# EAGLE board smartsensor (EAGLE 7.4.0)
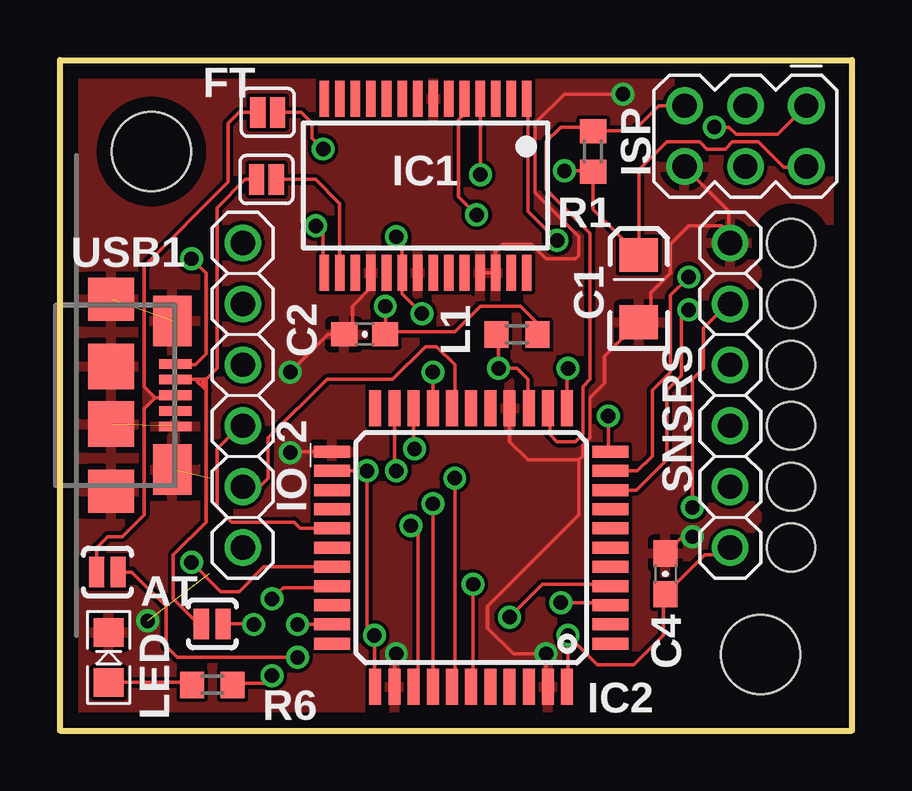
[diagram p0: board, top side]
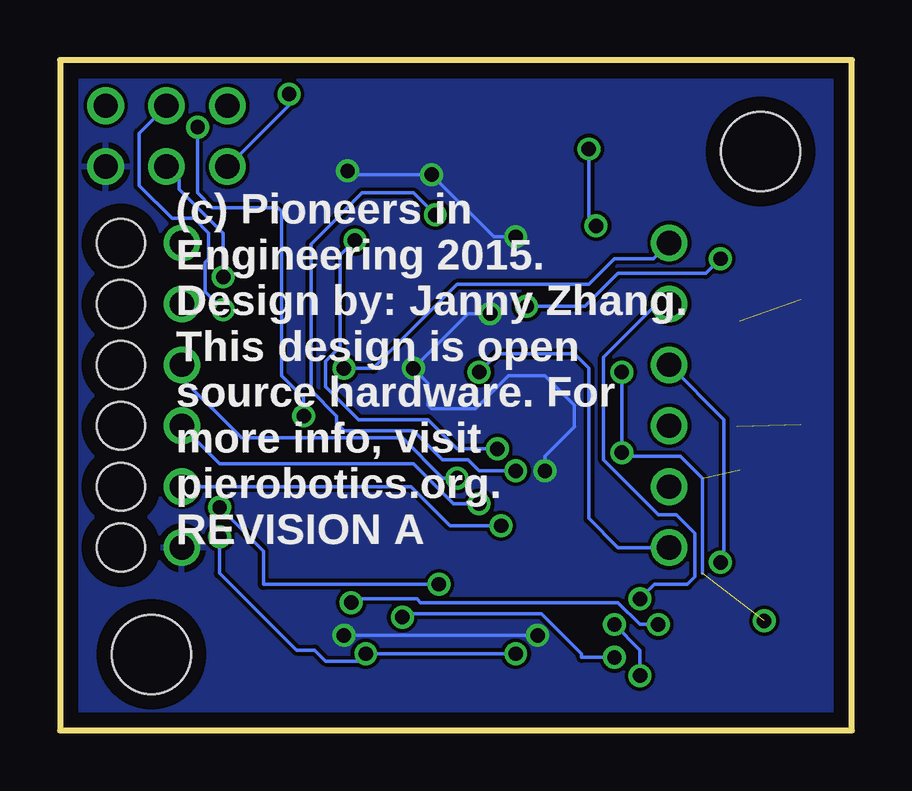
[diagram p1: board, bottom side, seen from below]

Size 33.02 x 27.94 mm. Coordinates in mm from the lower left corner, seen from the top.
Outline: 0,0 0,27.94 33.02,27.94 33.02,0 0,0
Copper layers (1*16): Top 2mil / dielectric 9mil / Bottom 2mil
Design rules "advancedcircuits-33each-pie": minimum track width 6mil, minimum drill 15mil, track to track 6mil, track to pad 6mil, pad to pad 6mil, via to via 6mil, smd to smd 6mil, copper to edge 25mil, drill to drill 7mil, minimum pad ring 7mil, minimum via ring 7mil, stop-mask expansion 3mil, vias tented up to drill 21mil, thermal gap 10mil

## Footprints (pad centres in the part's own frame; a part is rotated, then mirrored left to right if it is on the bottom)
SJ_2S-NO = smd 0.635 x 1.27: 1 -0.45,0; 2 0.45,0
EIA3216 = smd 1.4 x 1.6: A 1.4,0; C -1.4,0
0603-CAP = smd 1.1 x 1: 1 -0.85,0; 2 0.85,0
SJ_2S = smd 0.635 x 1.27: 1 -0.412,0; 2 0.412,0
STAND-OFF = hole 3.302: 0,0
SSOP28 = smd 0.4 x 1.5: 1 -4.225,-3.625; 2 -3.575,-3.625; 3 -2.925,-3.625; 4 -2.275,-3.625; 5 -1.625,-3.625; 6 -0.975,-3.625; 7 -0.325,-3.625; 8 0.325,-3.625; 9 0.975,-3.625; 10 1.625,-3.625; 11 2.275,-3.625; 12 2.925,-3.625; 13 3.575,-3.625; 14 4.225,-3.625; 15 4.225,3.625; 16 3.575,3.625; 17 2.925,3.625; 18 2.275,3.625; 19 1.625,3.625; 20 0.975,3.625; 21 0.325,3.625; 22 -0.325,3.625; 23 -0.975,3.625; 24 -1.625,3.625; 25 -2.275,3.625; 26 -2.925,3.625; 27 -3.575,3.625; 28 -4.225,3.625
TQFP44 = smd 1.5 x 0.5: 1 -5.8,4; 2 -5.8,3.2; 3 -5.8,2.4; 4 -5.8,1.6; 5 -5.8,0.8; 6 -5.8,0; 7 -5.8,-0.8; 8 -5.8,-1.6; 9 -5.8,-2.4; 10 -5.8,-3.2; 11 -5.8,-4; 23 5.8,-4; 24 5.8,-3.2; 25 5.8,-2.4; 26 5.8,-1.6; 27 5.8,-0.8; 28 5.8,0; 29 5.8,0.8; 30 5.8,1.6; 31 5.8,2.4; 32 5.8,3.2; 33 5.8,4 | smd 0.5 x 1.5: 12 -4,-5.8; 13 -3.2,-5.8; 14 -2.4,-5.8; 15 -1.6,-5.8; 16 -0.8,-5.8; 17 0,-5.8; 18 0.8,-5.8; 19 1.6,-5.8; 20 2.4,-5.8; 21 3.2,-5.8; 22 4,-5.8; 34 4,5.8; 35 3.2,5.8; 36 2.4,5.8; 37 1.6,5.8; 38 0.8,5.8; 39 0,5.8; 40 -0.8,5.8; 41 -1.6,5.8; 42 -2.4,5.8; 43 -3.2,5.8; 44 -4,5.8
1X06 = drill 1.016 pad 1.524: 1 -6.35,0; 2 -3.81,0; 3 -1.27,0; 4 1.27,0; 5 3.81,0; 6 6.35,0
MA03-2 = drill 1.016 pad 1.524: 1 -2.54,-1.27; 2 -2.54,1.27; 3 0,-1.27; 4 0,1.27; 5 2.54,-1.27; 6 2.54,1.27
R0603 = smd 1 x 1.1: 1 -0.85,0; 2 0.85,0
LED-0805 = smd 1.194 x 1.245: A -1.041,0; C 1.041,0
1X06-STRAINRELIEF = drill 1.016 pad 1.524: 1 -6.35,0; 2 -3.81,0; 3 -1.27,0; 4 1.27,0; 5 3.81,0; 6 6.35,0 | hole 2: -6.35,-2.54; -3.81,-2.54; -1.27,-2.54; 1.27,-2.54; 3.81,-2.54; 6.35,-2.54
USB-MICRO-AB = smd 0.4 x 1.35: P$1 -1.3,1; P$2 -0.65,1; P$3 0,1; P$4 0.65,1; P$5 1.3,1 | smd 2.1 x 1.6: P$6 -3.1,0.875; P$7 3.1,0.875 | smd 1.8 x 1.9: P$8 -4,-1.675; P$9 4,-1.675 | smd 1.9 x 1.9: P$10 -1.2,-1.675; P$11 1.2,-1.675

## Placement (x,y rotation side)
AT_D+  SOLDERJUMPERNO  [SJ_2S-NO]  1.98,6.6 0 top
AT_D-  SOLDERJUMPERNO  [SJ_2S-NO]  6.35,4.45 0 top
C1  10 uF  [EIA3216]  24.13,18.41 90 top
C2  10nF  [0603-CAP]  12.7,16.51 0 top
C4  0.1 uF  [0603-CAP]  25.25,6.53 270 top
FT_DM  SOLDERJUMPERNC  [SJ_2S]  8.61,22.96 0 top
FT_DP  SOLDERJUMPERNC  [SJ_2S]  8.66,25.76 0 top
HOLE1  [STAND-OFF]  3.81,24.13 0 top
HOLE2  [STAND-OFF]  29.21,3.17 0 top
IC1  FT232RL  [SSOP28]  15.24,22.71 180 top
IC2  ATMEGA32U4-AU  [TQFP44]  17.14,7.62 180 top
IO_2  [1X06]  7.62,13.97 90 top
ISP  [MA03-2]  28.57,24.77 180 top
L1  [R0603]  19.05,16.51 0 top
LED1  RED  [LED-0805]  2.03,3.05 90 top
R1  10k  [R0603]  22.23,24.13 90 top
R6  130  [R0603]  6.35,1.91 0 top
SENSORS_IO  [1X06-STRAINRELIEF]  27.94,13.97 90 top
USB1  USB-OTGMICRO-AB  [USB-MICRO-AB]  3.81,13.97 270 top

## Library data of the parts
AT_D+ AT_D- FT_DM FT_DP = pie; PIE-INT-REF-NUM: DNL
C1 HOLE1 HOLE2 L1 SENSORS_IO = pie
C2 C4 = pie; PIE-INT-REF-NUM: CAPACITOR-GENERIC
IC1 = ftdichip; MPN: FT232RL; OC_FARNELL: 1146032; OC_NEWARK: 91K9918
IC2 = pie; PIE-DIGIKEY-PN-ALT1: ATMEGA32U4-MURCT-ND; PIE-DIGIKEY-PN-PRI: ATMEGA32U4RC-MURCT-ND; PIE-INT-REF-NUM: ATmega32U4
IO_2 = pie; PARTNUMBER: 965
ISP = pie; OC_FARNELL: unknown; OC_NEWARK: unknown; PIE-INT-REF-NUM: BULK-STOCK
LED1 = pie; PIE-INT-REF-NUM: LED
R1 R6 = pie; PIE-INT-REF-NUM: RESISTOR-GENERIC
USB1 = pie; PIE-INT-REF-NUM: USB

## Nets
AT_D+: AT_D+.2 IC2.4
AT_D-: AT_D-.2 IC2.3
D+: AT_D+.1 FT_DP.1 USB1.P$3
D-: AT_D-.1 FT_DM.1 USB1.P$2
FT_15: FT_DP.2 IC1.15
FT_16: FT_DM.2 IC1.16
GND: C1.C C2.1 C4.1 IC1.7 IC1.18 IC1.21 IC1.25 IC1.26 IC2.15 IC2.23 IC2.35 IC2.43 ISP.6 LED1.C SENSORS_IO.6 USB1.P$5 USB1.P$6 USB1.P$7 USB1.P$8 USB1.P$9 USB1.P$10 USB1.P$11
IO0: IC2.36 SENSORS_IO.2
IO1: IC2.37 SENSORS_IO.3
IO2: IC2.38 SENSORS_IO.4
IO3: IC2.39 SENSORS_IO.5
IO4: IC2.19 IO_2.1
IO5: IC2.18 IO_2.2
IO6: IC2.27 IO_2.3
IO7: IC2.29 IO_2.4
IO8: IC2.30 IO_2.5
IO9: IC2.12 IO_2.6
LED: IC2.32 R6.2
MISO: IC2.11 ISP.1
MOSI: IC2.10 ISP.4
N$4: LED1.A R6.1
RESET: IC2.13 ISP.5 R1.2
RX: IC1.5 IC2.21
SCK: IC2.9 ISP.3
TX: IC1.1 IC2.20
VBUS: C2.2 L1.2 USB1.P$1
VCC: C1.A C4.2 IC1.4 IC1.20 IC2.14 IC2.24 IC2.34 IC2.44 ISP.2 L1.1 R1.1 SENSORS_IO.1

## Tracks (layer width: path | path; a pad name or v marks a point on that pad's centre or on a via)
AT_D+  (via drill 0.6)
  Top 0.152: 2.54,6.6 AT_D+.2 3,6.6 4.42,5.18 4.42,3.5 4.88,3.05 v9.91,3.05 | IC2.4 22.87,6.1 20.12,6.1 v18.75,4.72
  Bottom 0.152: v9.91,3.05 11.28,3.05 11.28,3.2 12.95,4.88 18.59,4.88 v18.75,4.72
AT_D-  (via drill 0.6)
  Top 0.152: AT_D-.2 8.05,4.45 v8.08,4.42 | v20.88,5.33 22.83,5.33 IC2.3
  Bottom 0.152: v8.08,4.42 8.84,4.42 9.75,5.33 17.98,5.33 18.14,5.49 20.73,5.49 v20.88,5.33
D+
  Top 0.152: 3.96,13.87 3.5,13.41 3.5,8.99 2.59,8.08 1.98,8.08 1.52,7.62 1.53,7.61 AT_D+.1 | USB1.P$3 4.71,13.87 3.96,13.87 | 3.96,13.87 3.5,14.33 3.5,19.36 7.01,22.86 7.01,25.3 7.47,25.76 FT_DP.1
  pour Top: 3.51,14.33 3.51,13.41 3.96,13.87
D-
  Top 0.152: 5.61,4.45 AT_D-.1 5.77,4.45 4.72,5.49 4.72,7.32 6.1,8.69 6.1,14.17 | 6.1,14.17 5.94,14.33 | 5.79,14.48 5.64,14.63 | USB1.P$2 5.64,14.63 | 5.64,14.63 5.79,14.63 | 5.79,14.63 5.94,14.63 | 6.1,14.63 6.55,15.09 6.55,21.79 7.72,22.96 FT_DM.1 8.1,22.86 | 6.1,14.17 6.1,14.63 | 6.1,14.63 5.94,14.63 | 5.94,14.63 5.94,14.33 | 5.94,14.33 5.79,14.48 | 5.79,14.48 5.79,14.63
FT_15  (via drill 0.6)
  Top 0.152: FT_DP.2 10.06,25.76 10.52,25.3 10.52,24.69 v10.97,24.23 | IC1.15 10.97,19.12 10.97,20.73 v10.67,21.03
  Bottom 0.152: v10.97,24.23 10.97,21.34 v10.67,21.03
FT_16
  Top 0.152: IC1.16 11.66,21.95 10.65,22.96 FT_DM.2
GND  (via drill 0.6)  (4 unrouted)
  Top 0.152: LED1.C 2.16,3.96 | v9.6,11.58 9.64,11.62 IC2.23 | IC1.25 IC1.26 18.16,19.99 18.44,20.27 19.66,20.27 20.27,19.66 21.49,19.66 21.64,19.81 21.64,20.57 19.81,22.4 19.81,25.3 21.03,26.52 v23.47,26.52 | IC1.18 12.95,18.44 12.19,17.68 12.19,16.85 C2.1 11.18,16.51 v9.6,14.94 | 20.34,1.14 IC2.43 20.27,1.9 v20.27,3.2 18.9,3.2 17.83,4.27 17.83,5.18 21.64,8.99 21.64,11.28 | C4.1 25.95,8.08 v26.36,8.08 | IC2.15 18.75,12.04 19.51,11.28 21.64,11.28 | 21.64,11.28 21.79,11.43 21.79,11.89 22.1,12.19 22.1,13.87 22.71,14.48 22.71,15.59 C1.C 24.64,17.02 24.64,18.23 25.45,19.05 25.45,20.27 26.21,21.03 27.58,21.03 27.94,20.68 SENSORS_IO.6 27.89,20.37 27.89,21.64 ISP.6 | IC2.35 13.95,3.12 v14.02,3.2
  Bottom 0.152: 6.25,6.55 6.25,10.52 7.16,11.43 9.45,11.43 v9.6,11.58 v9.6,14.94 | v23.47,26.52 23.47,26.06 ISP.6 | v26.36,8.08 26.36,6.55 23.16,3.35 22.4,3.35 21.95,2.9 20.57,2.9 v20.27,3.2 v14.02,3.2
  other vias: 3.66,4.57
  pour Top: 0,0 0,27.94 33.02,27.94 33.02,25.4 33.02,0
IO0  (via drill 0.6)
  Top 0.152: IC2.36 14.63,1.94 14.63,2.29 14.94,2.59 14.94,8.23 v14.63,8.53
  Bottom 0.152: v14.63,8.53 16.76,8.53 18.39,10.16 SENSORS_IO.2
IO1  (via drill 0.6)
  Top 0.152: v15.54,9.45 | v15.54,9.45 IC2.37
  Bottom 0.152: SENSORS_IO.3 26.36,11.12 18.29,11.12 16.61,9.45 v15.54,9.45
IO2  (via drill 0.6)
  Top 0.152: IC2.38 16.46,1.93 v16.46,10.52
  Bottom 0.152: SENSORS_IO.4 27.94,14.68 25.45,12.19 18.75,12.19 17.07,10.52 v16.46,10.52
IO3  (via drill 0.6)
  Top 0.152: IC2.39 17.22,1.9 v17.22,6.1 | v26.36,9.3 26.36,14.63 26.82,15.09 26.82,16.76 27.84,17.78 SENSORS_IO.5
  Bottom 0.152: v17.22,6.1 24.54,6.1 24.54,7.47 v26.36,9.3
IO4  (via drill 0.6)
  Top 0.152: IC2.19 | IC2.19 v15.54,14.94
  Bottom 0.152: v15.54,14.94 14.78,15.7 11.58,15.7 10.97,15.09 10.97,8.84 9.75,7.62 IO_2.1
IO5
  Top 0.152: IC2.18 16.46,13.53 16.46,15.24 15.7,16 15.24,16 13.87,14.63 11.12,14.63 8.69,12.19 8.69,10.52 8.33,10.16 IO_2.2
IO6
  Top 0.152: IC2.27 10.02,8.42 9.75,8.69 7.16,8.69 6.55,9.3 6.55,11.73 7.52,12.7 IO_2.3
IO7  (via drill 0.6)
  Top 0.152: IC2.29 8.5,6.82 7.47,5.79 6.71,5.79 v5.49,7.01
  Bottom 0.152: IO_2.4 5.33,12.95 5.33,7.47 5.49,7.32 v5.49,7.01
IO8  (via drill 0.6)
  Top 0.152: IC2.30 11.27,5.94 9.3,5.94 v8.84,5.49
  Bottom 0.152: v8.84,5.49 8.23,6.1 6.86,6.1 6.55,6.4 6.55,8.23 7.32,8.99 8.08,8.99 10.36,11.28 10.36,15.54 8.13,17.78 IO_2.5
IO9  (via drill 0.6)
  Top 0.152: v21.18,15.09 21.14,15.05 IC2.12
  Bottom 0.152: IO_2.6 8.28,19.66 9.91,19.66 10.97,18.59 16.46,18.59 19.96,15.09 v21.18,15.09
LED  (via drill 0.6)
  Top 0.152: R6.2 7.54,1.91 7.62,1.98 8.53,1.98 v8.84,2.29 | v9.91,4.42 IC2.32 | IC2.32
  Bottom 0.152: v8.84,2.29 8.84,3.35 v9.91,4.42
MISO  (via drill 0.6)
  Top 0.152: IC2.11 22.86,11.71 v22.86,13.11 | v27.28,25.15 27.89,25.15 28.19,24.84 29.92,24.84 ISP.1
  Bottom 0.152: v22.86,13.11 22.86,13.87 23.77,14.78 23.77,21.64 23.93,21.79 26.67,21.79 27.28,22.4 v27.28,25.15
MOSI  (via drill 0.6)
  Top 0.152: IC2.10 24.08,10.82 24.69,11.43 24.69,14.17 25.45,14.94 25.45,18.14 v26.21,18.9
  Bottom 0.152: v26.21,18.9 26.21,20.73 28.04,22.55 28.04,22.96 ISP.4
N$4
  Top 0.152: LED1.A 5.4,2.01 R6.1
RESET
  Top 0.152: IC2.13 20.42,13.34 20.42,12.34 20.73,12.04 21.49,12.04 21.79,12.34 21.79,14.33 22.1,14.63 22.1,20.73 20.27,22.55 20.27,24.54 20.88,25.15 22.06,25.15 R1.2 | 22.57,24.98 R1.2 | R1.2 22.24,24.99 23.93,24.99 24.97,26.04 ISP.5
RX  (via drill 0.6)
  Top 0.152: 16.92,25.91 16.86,25.96 IC1.5 16.92,26.28 16.92,25.76 16.61,25.45 16.61,22.25 v17.37,21.49 | IC2.21 13.95,10.9 v14.02,10.82
  Bottom 0.152: v14.02,10.82 15.54,10.82 16,11.28 17.07,11.28 18.29,12.5 21.18,12.5 21.49,12.8 21.49,13.11 22.55,14.17 22.55,20.27 20.42,22.4 18.29,22.4 v17.37,21.49
SCK  (via drill 0.6)
  Top 0.152: IC2.9 24.04,10.02 25.3,11.28 25.3,14.17 25.91,14.78 25.91,17.22 v26.21,17.53
  Bottom 0.152: v26.21,17.53 26.98,18.29 26.98,19.51 26.82,19.66 26.82,20.73 27.43,21.34 28.35,21.34 29.72,22.71 29.72,24.89 ISP.3
TX  (via drill 0.6)
  Top 0.152: v20.73,20.42 19.51,21.64 19.51,25.68 19.46,25.72 IC1.1 | v14.78,11.73 14.74,11.77 IC2.20
  Bottom 0.152: v20.73,20.42 21.34,19.81 21.34,16 21.95,15.39 21.95,14.33 20.57,12.95 17.68,12.95 16.46,11.73 v14.78,11.73
VBUS  (via drill 0.6)
  Top 0.152: USB1.P$1 4.84,15.24 5.64,15.24 6.1,15.7 6.1,19.05 v5.49,19.66 | L1.2 19.9,16.98 19.2,17.68 17.53,17.68 16.46,16.61 13.65,16.61 C2.2 13.56,16.52 v13.56,17.68
  Bottom 0.152: v5.49,19.66 6.1,19.05 9.75,19.05 11.12,17.68 v13.56,17.68
VCC  (via drill 0.6)
  Top 0.152: IC2.44 21.18,1.86 v21.18,3.96 22.4,2.74 23.93,2.74 25.15,3.96 25.15,5.58 C4.2 26.89,7.32 27.64,7.32 SENSORS_IO.1 | IC2.24 | IC2.24 v12.8,10.82 12.8,4.27 v13.11,3.96 13.11,1.86 IC2.34 | L1.1 18.29,16.42 v18.29,15.09 19.05,15.09 19.51,14.63 19.51,14.02 | 19.36,14.02 19.51,14.02 | 19.51,14.02 19.55,13.98 IC2.14 | v17.53,23.16 17.53,25.71 17.52,25.72 IC1.4 | v21.03,23.32 22.19,23.32 R1.1 22.23,21.72 C1.A 24.13,23.37 25.3,24.54 26.67,24.54 26.98,24.23 27.74,24.23 28.04,24.54 29.11,24.54 30.18,23.47 31.09,23.47 ISP.2 | v15.09,17.37 14.27,18.2 IC1.20 14.27,20.33 v14.02,20.57
  Bottom 0.152: v15.09,17.37 16,17.37 v18.29,15.09 17.68,14.48 17.68,13.56 17.53,13.41 15.7,13.41 14.33,14.78 12.8,14.78 11.58,13.56 11.58,12.65 12.8,11.43 v12.8,10.82 | v21.18,3.96 v13.11,3.96 | v14.02,20.57 14.94,20.57 v17.53,23.16 20.88,23.16 v21.03,23.32
  pour Bottom: 0,0 0,27.94 33.02,27.94 33.02,25.4 33.02,0

## Text on the board
tPlace: FT | SNSRS | AT | LED
bPlace: (c) Pioneers in / Engineering 2015. / Design by: Janny Zhang. / This design is open / source hardware. For / more info, visit / pierobotics.org. / REVISION A